# Altium PCB test.PcbDoc
Units mm, origin at the board's own origin, x right, y up, seen from the top; angles counter-clockwise.
Board outline 20.31 x 20.3 mm, 2 copper layers (Top Layer, Bottom Layer); 11 components, 7 nets, 25 pads, 0 vias.
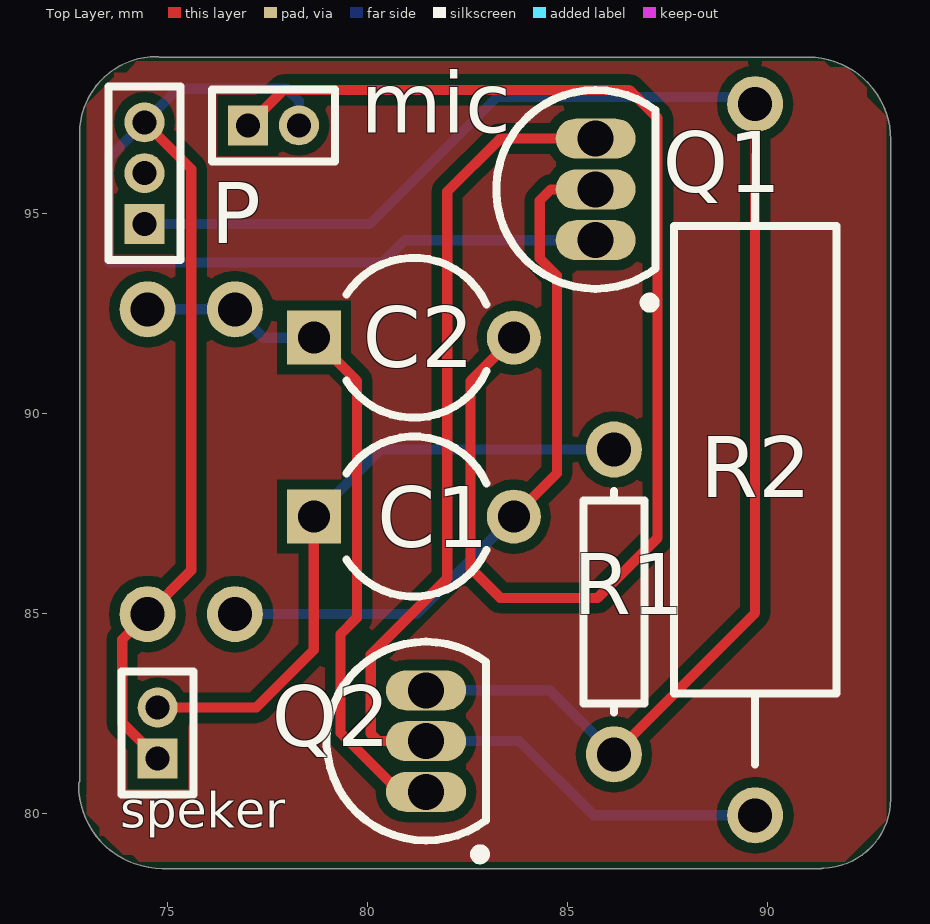
[diagram p0: Top Layer view]
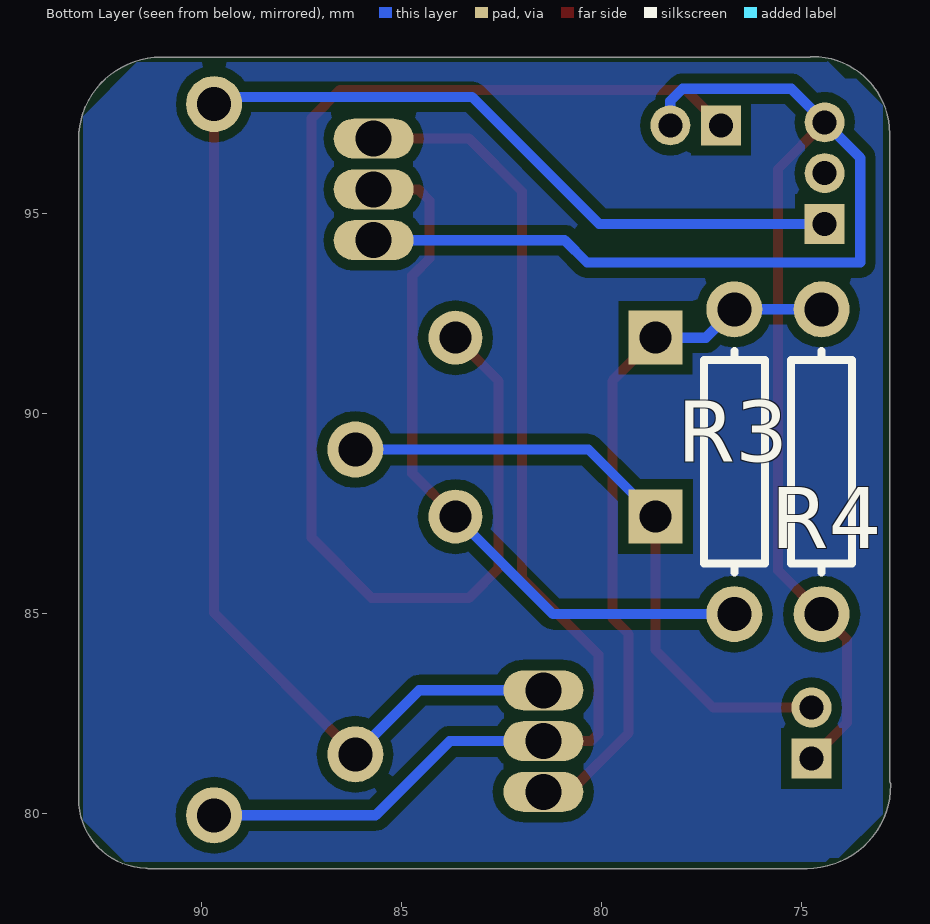
[diagram p1: Bottom Layer view, seen from below]

## Layer stack, top to bottom
Top Solder: solder mask 0.0102, Solder Resist, Dk 3.5
Top Layer: signal copper 0.0356
Dielectric 1: dielectric 0.32, FR-4, Dk 4.8
Bottom Layer: signal copper 0.0356
Bottom Solder: solder mask 0.0102, Solder Resist, Dk 3.5

## Board outline
72.798,80.798 72.798,96.997 cw(c74.729,96.997) 74.729,98.928 cw(c74.729,98.801) 74.792,98.911 91.012,98.911 cw(c91.012,96.846) 93.077,96.846 cw(c92.95,96.846) 93.076,96.83 93.076,80.366 cw(c91.347,80.366) 91.393,78.637 cw(c91.347,78.755) 91.347,78.628 74.865,78.628 cw(c74.865,80.721) 72.771,80.721 cw(c72.899,80.721)

## Design rules (kind name [scope] priority, off if disabled: settings)
Clearance [All] p1: gap=0.254 ignorepadtopadclearanceinfootprint=FALSE except(0: Arc-Hole Track-Hole SMDPad-Hole THPad-Hole Via-Hole Fill-Hole Poly-Hole Region-Hole Text-Hole)
PolygonConnect [All] p1: connectstyle=Relief reliefconductorwidth=0.254 reliefentries=4 polygonreliefangle="90 Angle" airgapwidth=0.254
RoomDefinition test [InComponentClass('test')] p1: confinementstyle=ConfineIn formatcopy=TRUE lockcomponents=FALSE outline 76.835,44.958 136.271,44.958 136.271,67.31 76.835,67.31
RoutingVias [All] p1: holewidth=0.711 width=1.27 viastyle="Through Hole" minholewidth=0.711 minwidth=1.27 maxholewidth=0.711 maxwidth=1.27
SolderMaskExpansion [All] p1: expansion=0.102
Width [All] p1: maxlimit=0.254 minlimit=0.254 preferedwidth=0.254
30 further rules are at their usual default settings.

## Components (designator, comment, footprint, x,y, rotation, side; value= is the part's Value field where it differs from the comment)
C1 "Cap2" CAPR5-4X5 81.153,87.427 r0 top value=1μF
C2 "Cap2" CAPR5-4X5 81.153,91.897 r0 top value=1μF
mic "MHDR1X2" MHDR1X2 77.013,97.206 r0 top
P "source" MHDR1X3 74.422,94.742 r90 top
Q1 "C1815" TO-92A 85.7,95.606 r0 top
Q2 "C1815" TO-92A 81.458,81.813 r0 top
R1 "Res1" AXIAL-0.3 86.157,85.293 r90 top value=22K
R2 "Res Adj1" AXIAL-0.7 89.687,88.849 r90 top value=10K
R3 "Res1" AXIAL-0.3 76.683,88.798 r90 bottom value=300k
R4 "Res1" AXIAL-0.3 74.498,88.798 r90 bottom value=10K
speker "MHDR1X2" MHDR1X2 74.752,81.382 r90 top

## Footprints (in the part's own frame and the unit in brackets; to place one, negate y for a bottom-side part, rotate by r counter-clockwise, add the part's x,y. Pads: shape width x height; smd on the part's side, far side on the other; paste and mask are expansions set on the pad)
AXIAL-0.3 [mm] "Axial Device, Thru-Hole; 2 Leads; 0.3 in Pin Spacing"
  round 1.4 hole 0.85: 1(-3.81,0) 2(3.81,0)
  silkscreen extent -2.77,-0.76 2.77,0.76
AXIAL-0.7 [mm] "Axial Device, Thru-Hole; 2 Leads; 0.7 in Pin Spacing"
  round 1.4 hole 0.85: 1(-8.89,0) 2(8.89,0)
  silkscreen extent -7.62,-2.03 7.62,2.03
CAPR5-4X5 [mm] "Capacitor; 2 Leads"
  rect 1.35x1.35 hole 0.8: 1(-2.5,0)
  round 1.35 hole 0.8: 2(2.5,0)
  silkscreen extent -1.69,-2 1.82,2
MHDR1X2 [mm] "Connector; Header; 2 Position"
  rect 1x1 hole 0.6: 1(0,0)
  round 1 hole 0.6: 2(1.27,0)
  silkscreen extent -0.9,-0.9 2.17,0.9
MHDR1X3 [mm] "Connector; Header; 3 Position"
  rect 1x1 hole 0.6: 1(0,0)
  round 1 hole 0.6: 2(1.27,0) 3(2.54,0)
  silkscreen extent -0.9,-0.9 3.44,0.9
TO-92A [mm] "TO, Flat Index; 3 In-Line, Axial Leads; Body Dia. 4.5mm; Leads 0.51 x 0.48 mm (max)"
  oval 2x1 hole 0.9: 1(0,-1.27) 2(0,0) 3(0,1.27)
  silkscreen extent -2.48,-2.95 1.5,2.48, body extent -2.48,-2.5 1.5,2.5, height 6.86

## Part data
C1 C2: "Capacitor", PackageDescription="Capacitor; 2 Leads", PackageReference=CAPR5-4X5, Published=23-Sep-2002, Publisher="Altium Limited"
mic speker: "Header, 2-Pin", LatestRevisionDate=17-Jul-2002, LatestRevisionNote="Re-released for DXP Platform.", Publisher="Altium Limited"
P: library part MHDR1X3, "Header, 3-Pin", LatestRevisionDate=17-Jul-2002, LatestRevisionNote="Re-released for DXP Platform.", Publisher="Altium Limited"
Q1 Q2: library part 2N3904, "NPN General Purpose Amplifier", ComponentLink1Description="Manufacturer Link", ComponentLink1URL=http://www.fairchildsemi.com/, ComponentLink2Description=Datasheet, ComponentLink2URL=http://www.fairchildsemi.com/ds/2N%2F2N3904.pdf, DatasheetVersion=1997, LatestRevisionDate=15-Jan-2003, LatestRevisionNote="PCB Footprint 'BCY-W3/D4.7' replaced", PackageDescription="TO, Flat Index; 3 In-Line, Axial Leads; Body Dia. 4.5mm; Leads 0.51 x 0.48 mm (max)", PackageReference=TO-92A, PackageVersion=Sep-1998, Published=8-Jun-2000, Publisher="Altium Limited"
R1 R3 R4: "Resistor", LatestRevisionDate=17-Jul-2002, LatestRevisionNote="Re-released for DXP Platform.", PackageDescription="Axial Device, Thru-Hole; 2 Leads; 0.3 in Pin Spacing", PackageReference=AXIAL-0.3, Published=8-Jun-2000, Publisher="Altium Limited"
R2: "Variable Resistor", LatestRevisionDate=17-Jul-2002, LatestRevisionNote="Re-released for DXP Platform.", PackageDescription="Axial Device, Thru-Hole; 2 Leads; 0.7 in Pin Spacing", PackageReference=AXIAL-0.7, Published=8-Jun-2000, Publisher="Altium Limited", Set Position=0.5

## Nets (pads, with @x,y where several pads share a name; then routed paths per layer and width w, separated by ;. In a path a pad name is that pad's centre, name@x,y a point inside that pad or via, vN(x,y) a via of type N, cw(c..) or ccw(c..) an arc to the next point about the centre after c; other vN are vias at no path point)
+5: P.1 Q2.3 R1.1 R2.2 | length 39.8
  Top Layer w0.254: R1.1 89.687,85.014 R2.2
  Bottom Layer w0.254: P.1 80.061,94.742 83.236,97.917 89.687,97.917 R2.2 ; Q2.3 84.557,83.083 R1.1
GND: mic.2 P.3 Q1.1 R4.1 speker.1 | length 38.7
  Top Layer w0.254: P.3 75.59,96.114 75.59,86.081 R4.1 73.863,84.353 73.863,82.271 speker.1
  Bottom Layer w0.254: mic.2 78.283,97.815 77.978,98.12 75.26,98.12 P.3 73.533,96.393 73.533,93.777 80.366,93.777 80.924,94.336 Q1.1
NetC1_1: C1.1 R1.2 speker.2 | length 16
  Top Layer w0.254: speker.2 77.216,82.652 78.653,84.089 C1.1
  Bottom Layer w0.254: C1.1 80.329,89.103 R1.2
NetC1_2: C1.2 Q1.2 R3.1 | length 18
  Top Layer w0.254: C1.2 84.734,88.508 84.734,93.447 84.303,93.878 84.303,95.326 84.582,95.606 Q1.2
  Bottom Layer w0.254: R3.1 81.215,84.988 C1.2
NetC2_1: C2.1 Q2.1 R3.2 R4.2 | length 17.7
  Top Layer w0.254: C2.1 79.731,90.82 79.731,84.896 79.324,84.49 79.324,82.017 80.797,80.543 Q2.1
  Bottom Layer w0.254: R4.2 R3.2 77.394,91.897 C2.1
NetC2_2: C2.2 mic.1 | length 33.2
  Top Layer w0.254: mic.1 77.902,98.095 86.538,98.095 87.249,97.384 87.249,86.893 85.75,85.395 83.312,85.395 82.575,86.131 82.575,90.82 C2.2
NetQ1_3: Q1.3 Q2.2 R2.1 | length 29.1
  Top Layer w0.254: Q2.2 80.264,81.813 80.077,82.001 80.077,83.972 81.991,85.887 81.991,95.555 83.312,96.876 Q1.3
  Bottom Layer w0.254: Q2.2 83.795,81.813 85.649,79.959 R2.1
pads on no net: P.2

## Polygon pours and split planes (outlines as drawn)
no net on Top Layer "Top Layer-No Net" (solid, pour order 6): 96.164,102.108
no net on Top Layer "Top Layer-No Net 1" (solid, pour order 4): 81.432,90.907
no net on Top Layer "Top Layer-No Net 2" (solid, pour order 2): 74.143,98.704 73.965,98.527 73.66,98.527 73.66,98.425 72.974,97.739 72.974,80.467 72.949,80.442 72.974,80.416 72.974,79.985 73.304,79.654 73.304,79.451 73.406,79.451 73.889,78.969 74.117,78.969 74.295,78.791 91.923,78.791 92.964,79.832 92.964,97.434 92.481,97.917 92.481,98.146 91.973,98.654 91.567,98.654 91.415,98.806 74.193,98.806 74.117,98.73
no net on Bottom Layer "Bottom Layer-No Net" (solid, pour order 10): 77.775,95.377
no net on Bottom Layer "Bottom Layer-No Net 1" (solid, pour order 8): 73.635,98.374 72.974,97.714 72.974,79.985 74.066,78.892 74.295,78.892 74.397,78.791 91.923,78.791 92.964,79.832 92.964,97.434 91.618,98.781 74.371,98.781 74.346,98.806 73.914,98.374

## Silkscreen, mask and mechanical layers (free items; w line width, h text height)
Mechanical 1:
  lines w0.254: 72.899,80.721 ccw(c74.865,80.721) 74.894,78.755 ; 72.925,80.747 72.925,96.997 cw(c74.729,96.997) 74.729,98.801 ; 74.729,98.784 91.012,98.784 cw(c91.012,96.846) 92.95,96.846 ; 74.865,78.755 91.347,78.755 ; 91.347,78.763 ccw(c91.347,80.366) 92.949,80.366 92.949,96.846